# Altium PCB MotoCtrl_Rev_1.0.0.PcbDoc
Units mm, origin at the board's own origin, x right, y up, seen from the top; angles counter-clockwise.
Board outline 100 x 100 mm, 4 copper layers (Top Layer, GND, VCC, Bottom Layer), stack 0.568 mm thick; 83 components, 51 nets, 305 pads, 0 vias.
Unrouted connection lines stored in the file: 137.
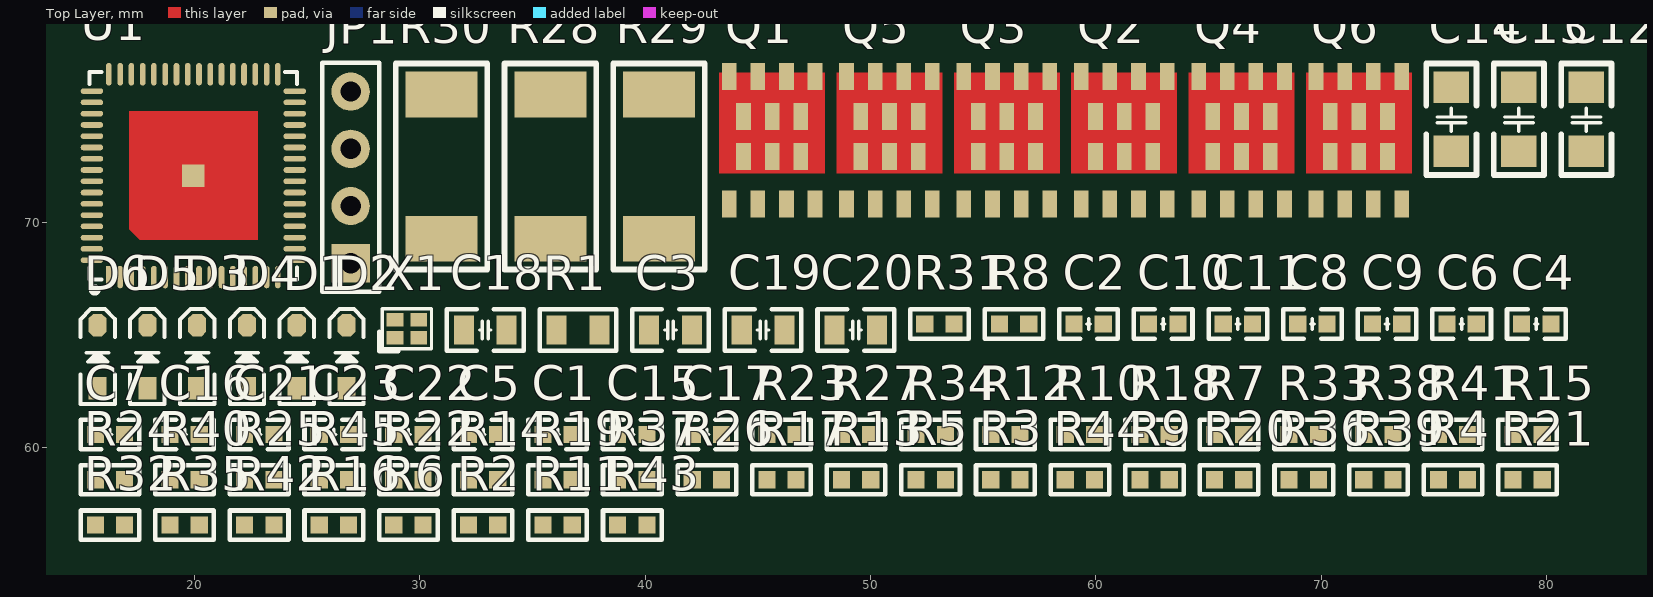
[diagram p0: Top Layer view]
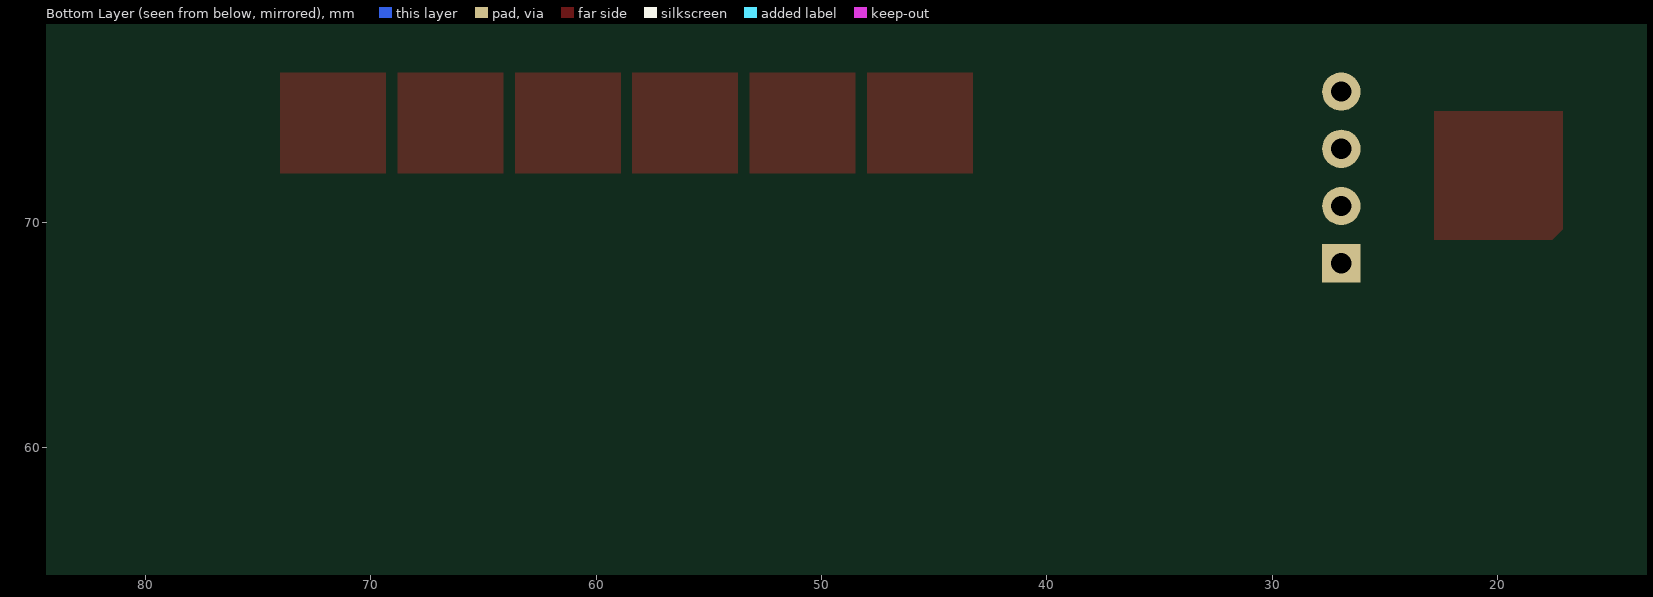
[diagram p1: Bottom Layer view, seen from below]

## Layer stack, top to bottom
Top Solder: solder mask 0.0102, Solder Resist, Dk 3.5
Top Layer: signal copper 0.0356
Dielectric 2: prepreg 0.0711, PP-006, Dk 4.1
GND: signal copper 0.0175
Dielectric 1: dielectric 0.32, FR-4, Dk 4.8
VCC: signal copper 0.0175
Dielectric 3: prepreg 0.0711, PP-006, Dk 4.1
Bottom Layer: signal copper 0.0356
Bottom Solder: solder mask 0.0102, Solder Resist, Dk 3.5

## Board outline
50,0 cw(c50,50) 0,50 cw(c50,50) 50,100 cw(c50,50) 100,50 cw(c50,50)

## Design rules (kind name [scope] priority, off if disabled: settings)
Clearance [All] p1: gap=0.254 ignorepadtopadclearanceinfootprint=TRUE except(0: Arc-Hole Track-Hole SMDPad-Hole THPad-Hole Via-Hole Fill-Hole Poly-Hole Region-Hole Text-Hole)
PolygonConnect [All] p1: connectstyle=Relief reliefconductorwidth=0.254 reliefentries=4 polygonreliefangle="90 Angle" airgapwidth=0.254
RoutingVias [All] p1: holewidth=0.711 width=1.27 viastyle="Through Hole" minholewidth=0.711 minwidth=1.27 maxholewidth=0.711 maxwidth=1.27
SolderMaskExpansion [All] p1: expansion=0.102 istentingtop=FALSE
Width [All] p1: maxlimit=0.254 minlimit=0.254 preferedwidth=0.254
30 further rules are at their usual default settings.

## Classes and differential pairs
component class Designator: C1 C12 C13 C14 C15 C16 C17 C18 C19 C20 C21 C22 D1 D2 D3 D5 D6 Q1 Q2 Q3 Q4 Q6 R5 R7 R8 R9 R10 R11 R12 R13 R14 R15 R17 R18 R19 R20 R21 R22 R23 R24 R25 R26 R27 R28 R29 R30 R31 R32 R33 R34 R35 R36 R37 R38 R39 R40 R41 R42 R43 R44 R45

## Components (designator, comment, footprint, x,y, rotation, side; value= is the part's Value field where it differs from the comment)
C1 "104" "C 0603_L" 36.123,60.576 r0 top
C2 "104" "C 0603_L" 59.687,65.478 r0 top
C3 "106" "C 0805_L" 41.131,65.213 r0 top
C4 "104" "C 0603_L" 79.554,65.478 r0 top
C5 "105" "C 0603_L" 32.812,60.576 r0 top
C6 "104" "C 0603_L" 76.243,65.478 r0 top
C7 "105" "C 0603_L" 16.256,60.576 r0 top
C8 "104" "C 0603_L" 69.621,65.478 r0 top
C9 "104" "C 0603_L" 72.932,65.478 r0 top
C10 "104" "C 0603_L" 62.998,65.478 r0 top
C11 "104" "C 0603_L" 66.31,65.478 r0 top
C12 "4.7uF" "C 1206_L" 81.778,74.537 r90 top
C13 "4.7uF" "C 1206_L" 78.781,74.537 r90 top
C14 "4.7uF" "C 1206_L" 75.784,74.537 r90 top
C15 "104" "C 0603_L" 39.434,60.576 r0 top
C16 "104" "C 0603_L" 19.567,60.576 r0 top
C17 "104" "C 0603_L" 42.745,60.576 r0 top
C18 "4.7uF" "C 0805_L" 32.909,65.213 r0 top
C19 "4.7uF" "C 0805_L" 45.242,65.213 r0 top
C20 "4.7uF" "C 0805_L" 49.354,65.213 r0 top
C21 "104" "C 0603_L" 22.878,60.576 r0 top
C22 "104" "C 0603_L" 29.5,60.576 r0 top
C23 "104" "C 0603_L" 26.189,60.576 r0 top
D1 "1N4148" SOD-323 24.544,64.032 r90 top
D2 "1N4148" SOD-323 26.754,64.032 r90 top
D3 "1N4148" SOD-323 20.124,64.032 r90 top
D4 "1N4148" SOD-323 22.334,64.032 r90 top
D5 "1N4148" SOD-323 17.915,64.032 r90 top
D6 "1N4148" SOD-323 15.705,64.032 r90 top
JP1 "HDR-1X4" HDR2.54-LI-4P 26.935,71.984 r90 top
Q1 "BSC028N06NS" BSC028N06NS 43.736,70.812 r0 top
Q2 "BSC028N06NS" BSC028N06NS 59.36,70.812 r0 top
Q3 "BSC028N06NS" BSC028N06NS 54.152,70.812 r0 top
Q4 "BSC028N06NS" BSC028N06NS 64.568,70.812 r0 top
Q5 "BSC028N06NS" BSC028N06NS 48.944,70.812 r0 top
Q6 "BSC028N06NS" BSC028N06NS 69.776,70.812 r0 top
R1 "0R" "R 0805_L" 37.02,65.213 r0 top
R2 "0R" "R 0603_L" 32.812,56.553 r0 top
R3 "10K" "R 0603_L" 55.99,58.564 r0 top
R4 "0R" "R 0603_L" 75.857,58.564 r0 top
R5 "0R" "R 0603_L" 52.679,58.564 r0 top
R6 "0R" "R 0603_L" 29.5,56.553 r0 top
R7 "0R" "R 0603_L" 65.924,60.576 r0 top
R8 "0R" "R 0603_L" 56.376,65.478 r0 top
R9 "0R" "R 0603_L" 62.612,58.564 r0 top
R10 "22R" "R 0603_L" 59.301,60.576 r0 top
R11 "22R" "R 0603_L" 36.123,56.553 r0 top
R12 "22R" "R 0603_L" 55.99,60.576 r0 top
R13 "10K" "R 0603_L" 49.368,58.564 r0 top
R14 "10K" "R 0603_L" 32.812,58.564 r0 top
R15 "10K" "R 0603_L" 79.168,60.576 r0 top
R16 "0R" "R 0603_L" 26.189,56.553 r0 top
R17 "0R" "R 0603_L" 46.056,58.564 r0 top
R18 "0R" "R 0603_L" 62.612,60.576 r0 top
R19 "0R" "R 0603_L" 36.123,58.564 r0 top
R20 "0R" "R 0603_L" 65.924,58.564 r0 top
R21 "0R" "R 0603_L" 79.168,58.564 r0 top
R22 "22R" "R 0603_L" 29.5,58.564 r0 top
R23 "22R" "R 0603_L" 46.056,60.576 r0 top
R24 "22R" "R 0603_L" 16.256,58.564 r0 top
R25 "10K" "R 0603_L" 22.878,58.564 r0 top
R26 "10K" "R 0603_L" 42.745,58.564 r0 top
R27 "10K" "R 0603_L" 49.368,60.576 r0 top
R28 "0.002R" "R 2512_M" 35.798,72.465 r90 top
R29 "0.002R" "R 2512_M" 40.624,72.465 r90 top
R30 "0.002R" "R 2512_M" 30.972,72.465 r90 top
R31 "10K" "R 0603_L" 53.065,65.478 r0 top
R32 "10K" "R 0603_L" 16.256,56.553 r0 top
R33 "10K" "R 0603_L" 69.235,60.576 r0 top
R34 "10K" "R 0603_L" 52.679,60.576 r0 top
R35 "10K" "R 0603_L" 19.567,56.553 r0 top
R36 "10K" "R 0603_L" 69.235,58.564 r0 top
R37 "1K" "R 0603_L" 39.434,58.564 r0 top
R38 "1K" "R 0603_L" 72.546,60.576 r0 top
R39 "1K" "R 0603_L" 72.546,58.564 r0 top
R40 "1K" "R 0603_L" 19.567,58.564 r0 top
R41 "1K" "R 0603_L" 75.857,60.576 r0 top
R42 "1K" "R 0603_L" 22.878,56.553 r0 top
R43 "80.6K" "R 0603_L" 39.434,56.553 r0 top
R44 "80.6K" "R 0603_L" 59.301,58.564 r0 top
R45 "80.6K" "R 0603_L" 26.189,58.564 r0 top
U1 "STSPIN32G4" "QFN64 9x9_L" 19.956,72.062 r0 top
X1 "26M" "OSC 1612-4P" 29.432,65.265 r0 top

## Footprints (in the part's own frame and the unit in brackets; to place one, negate y for a bottom-side part, rotate by r counter-clockwise, add the part's x,y. Pads: shape width x height; smd on the part's side, far side on the other; paste and mask are expansions set on the pad)
BSC028N06NS [mm] "TDSON-8(5x6) N沟道,60V,100A,2.8mΩ@10V"
  rect 0.65x1.2 smd: 1(0,0) 1(1.27,0) 1(2.54,0) 2(3.81,0) 3(0,5.65) 3(0.635,2.108) 3(0.635,3.879) 3(1.27,5.65) 3(1.905,2.108) 3(1.905,3.879) 3(2.54,5.65) 3(3.175,2.108) 3(3.175,3.879) 3(3.81,5.65)
  Top Layer region: -0.445,1.352 4.255,1.352 4.255,5.822 -0.445,5.822
  body extent -0.44,-0.17 4.25,5.82, height 1.01
"C 0603_L" [mil] "无极性贴片电容"
  rect 30x30 smd: 1(-25.59,0) 2(25.59,0)
  silkscreen extent -51,-26 51,26, body extent -31,-16 31,16, height 32
"C 0805_L" [mil] "无极性贴片电容"
  rect 35x50 smd: 1(-37.4,0) 2(37.4,0)
  silkscreen extent -67,-36 67,36, body extent -39,-24 39,24, height 20
"C 1206_L" [mil] "无极性贴片电容"
  rect 55x62 smd: 1(-55.12,0) 2(57.09,0)
  silkscreen extent -96,-44 98,44, body extent -63,-32 63,32, height 48
HDR2.54-LI-4P [mm] "排针，4脚"
  rect 1.7x1.7 hole 0.9: 1(-3.81,0)
  round 1.7 hole 0.9: 2(-1.27,0) 3(1.27,0) 4(3.81,0)
  silkscreen extent -5.08,-1.27 5.08,1.27, body extent -5.08,-1.27 5.08,1.27, height 8.5
"OSC 1612-4P" [mm] "1.6*1.2*0.35mm（长宽高）"
  rect 0.75x0.6 smd: 1(-0.525,-0.4) 2(0.525,-0.4) 3(0.525,0.4) 4(-0.525,0.4)
  silkscreen extent -1.22,-0.99 1.09,0.89, body extent -0.8,-0.6 0.8,0.6, height 0.35
"QFN64 9x9_L" [mm] "64脚，长x宽x高：9x9x1mm，脚距：0.5mm"
  rect 0.25x1 smd: 1(-3.75,-4.5)
  oval 0.25x1 smd: 2(-3.25,-4.5) 3(-2.75,-4.5) 4(-2.25,-4.5) 5(-1.75,-4.5) 6(-1.25,-4.5) 7(-0.75,-4.5) 8(-0.25,-4.5) 9(0.25,-4.5) 10(0.75,-4.5) 11(1.25,-4.5) 12(1.75,-4.5) 13(2.25,-4.5) 14(2.75,-4.5) 15(3.25,-4.5) 16(3.75,-4.5) 33(3.75,4.5) 34(3.25,4.5) 35(2.75,4.5) 36(2.25,4.5) 37(1.75,4.5) 38(1.25,4.5) 39(0.75,4.5) 40(0.25,4.5) 41(-0.25,4.5) 42(-0.75,4.5) 43(-1.25,4.5) 44(-1.75,4.5) 45(-2.25,4.5) 46(-2.75,4.5) 47(-3.25,4.5) 48(-3.75,4.5)
  oval 1x0.25 smd: 17(4.5,-3.75) 18(4.5,-3.25) 19(4.5,-2.75) 20(4.5,-2.25) 21(4.5,-1.75) 22(4.5,-1.25) 23(4.5,-0.75) 24(4.5,-0.25) 25(4.5,0.25) 26(4.5,0.75) 27(4.5,1.25) 28(4.5,1.75) 29(4.5,2.25) 30(4.5,2.75) 31(4.5,3.25) 32(4.5,3.75) 49(-4.5,3.75) 50(-4.5,3.25) 51(-4.5,2.75) 52(-4.5,2.25) 53(-4.5,1.75) 54(-4.5,1.25) 55(-4.5,0.75) 56(-4.5,0.25) 57(-4.5,-0.25) 58(-4.5,-0.75) 59(-4.5,-1.25) 60(-4.5,-1.75) 61(-4.5,-2.25) 62(-4.5,-2.75) 63(-4.5,-3.25) 64(-4.5,-3.75)
  rect 1x1 smd: 69(0,0)
  Top Layer region: -2.85,2.85 2.85,2.85 2.85,-2.85 -2.375,-2.85 -2.85,-2.375
  silkscreen extent -4.6,-5.2 4.6,4.6, body extent -4.51,-4.51 4.51,4.51, height 0.95
"R 0603_L" [mil] "1/10W贴片电阻"
  rect 30x30 smd: 1(-25.59,0) 2(25.59,0)
  silkscreen extent -51,-26 51,26, body extent -31,-16 32,16, height 16
"R 0805_L" [mil] "1/8W贴片电阻"
  rect 35x50 smd: 1(-37.4,0) 2(37.4,0)
  silkscreen extent -67,-36 67,36, body extent -39,-25 39,25, height 20
"R 2512_M" [mm] "1W贴片电阻"
  rect 2.032x3.2 smd: 1(-3.2,0) 2(3.2,0)
  silkscreen extent -4.57,-2.03 4.57,2.03, body extent -3.2,-1.6 3.2,1.6, height 0.55
SOD-323 [mm] "1.8x1.3X0.9mm（长宽高，不包括引脚）"
  rect 1x0.8 smd: 1(-1.4,0)
  oct 1x0.8 smd: 2(1.4,0)
  silkscreen extent -2.11,-0.76 2.11,0.76, body extent -1.34,-0.63 1.31,0.67, height 1

## Part data
C1 C2 C3 C4 C5 C6 C7 C8 C9 C10 C11 C12 C13 C14 C15 C16 C17 C18 C19 C20 C21 C22 C23: library part C, "无极性贴片电容", BOM名称=无极性贴片电容, 学习资源=www.ooocke.com, 版权归属=源创客
D1 D2 D3 D4 D5 D6: "高速开关二极管", BOM名称=高速开关二极管, 学习资源=www.ooocke.com, 版权归属=源创客
JP1: library part "Header 4", "4P接插件", BOM名称=4P接插件, 学习资源=www.ooocke.com, 版权归属=源创客
Q1 Q2 Q3 Q4 Q5 Q6: "N沟场，60V/100A", BOM名称=N沟场效应管, 学习资源=www.ooocke.com, 版权归属=源创客
R1 R2 R3 R4 R5 R6 R7 R8 R9 R10 R11 R12 R13 R14 R15 R16 R17 R18 R19 R20 R21 R22 R23 R24 R25 R26 R27 R28 R29 R30 R31 R32 R33 R34 R35 R36 R37 R38 R39 R40 R41 R42 R43 R44 R45: library part R, "贴片电阻", BOM名称=贴片电阻, 学习资源=www.ooocke.com, 版权归属=源创客
X1: library part XTAL-4P, "4脚无源晶振", BOM名称=4脚无源晶振, 学习资源=www.ooocke.com, 版权归属=源创客

## Nets (pads, with @x,y where several pads share a name; then routed paths per layer and width w, separated by ;. In a path a pad name is that pad's centre, name@x,y a point inside that pad or via, vN(x,y) a via of type N, cw(c..) or ccw(c..) an arc to the next point about the centre after c; other vN are vias at no path point)
BOOT1: C18.2
BOOT2: C19.2
BOOT3: C20.2
GHS1: D1.2 R10.2
GHS2: D2.2 R11.2
GHS3: D3.2 R12.2
GLS1: D4.2 R22.2
GLS2: D5.2 R23.2
GLS3: D6.2 R24.2
NetC1_2: C1.2 R1.1 U1.61
NetD1_1: D1.1 R7.2
NetD2_1: D2.1 R8.2
NetD3_1: D3.1 R9.2
NetD4_1: D4.1 R19.2
NetD5_1: D5.1 R20.2
NetD6_1: D6.1 R21.2
NetQ1_2: Q1.2 R7.1 R10.1 R13.2
NetQ2_2: Q2.2 R8.1 R11.1 R14.2
NetQ3_2: Q3.2 R9.1 R12.1 R15.2
NetQ4_2: Q4.2 R19.1 R22.1 R25.2
NetQ5_2: Q5.2 R20.1 R23.1 R26.2
NetQ6_2: Q6.2 R21.1 R24.1 R27.2
nRST: C2.2 R3.1 U1.8
OSC_IN: C10.1 X1.1
OSC_OUT: C11.1 X1.3
OUT1: C18.1 R16.2
OUT2: C19.1 R17.2
OUT3: C20.1 R18.2
PA1: R31.1 R32.2 R37.1
PA2: C21.1 R43.1
PA3: C21.2 R40.1 R43.2
PA6: C22.1 R44.1
PA7: R33.1 R34.2 R38.1
PB0: R35.1 R36.2 R39.1
PB1: C23.1 R45.1
PB2: C23.2 R42.1 R45.2
PC5: C22.2 R41.1 R44.2
SWCLK: JP1.3
SWDIO: JP1.2
U: Q1.1 Q2.1 Q3.1 Q4.3 Q5.3 Q6.3 R13.1 R14.1 R15.1 R16.1 R17.1 R18.1
VBAT: C9.2 R4.1
VCC: R2.2
VDD: C3.2 C4.2 JP1.1 R3.2 R4.2 R5.2
VDDA: C5.2 C6.2 R5.1 R6.2
VM: C12.2 C13.2 C14.2 C15.2 C16.2 C17.2 Q1.3 Q2.3 Q3.3 R1.2
VREF: C7.2 C8.2 R6.1 R31.2 R33.2 R35.2
VREGIN: R2.1
VSHUNT1N: C1.1 C2.1 C3.1 C4.1 C5.1 C6.1 C7.1 C8.1 C9.1 C10.2 C11.2 C12.1 C13.1 C14.1 C15.1 C16.1 C17.1 JP1.4 R28.2 R29.2 R30.2 R32.1 R34.1 R36.1 R40.2 R41.2 R42.2 X1.2 X1.4
VSHUNT1P: Q4.1 R25.1 R28.1 R37.2
VSHUNT2P: Q5.1 R26.1 R29.1 R38.2
VSHUNT3P: Q6.1 R27.1 R30.1 R39.2
pads on no net: U1.1 U1.2 U1.3 U1.4 U1.5 U1.6 U1.7 U1.9 U1.10 U1.11 U1.12 U1.13 U1.14 U1.15 U1.16 U1.17 U1.18 U1.19 U1.20 U1.21 U1.22 U1.23 U1.24 U1.25 U1.26 U1.27 U1.28 U1.29 U1.30 U1.31 U1.32 U1.33 U1.34 U1.35 U1.36 U1.37 U1.38 U1.39 U1.40 U1.41 U1.42 U1.43 U1.44 U1.45 U1.46 U1.47 U1.48 U1.49 U1.50 U1.51 U1.52 U1.53 U1.54 U1.55 U1.56 U1.57 U1.58 U1.59 U1.60 U1.62 U1.63 U1.64 U1.69

## Keep-outs
Keep-Out Layer:
  circle w0.025: c50,50 r50

## Silkscreen, mask and mechanical layers (free items; w line width, h text height)
Mechanical 1:
  circle w0.025: c50.127,50 r50